# EAGLE board blinker.earring (EAGLE 6.1)
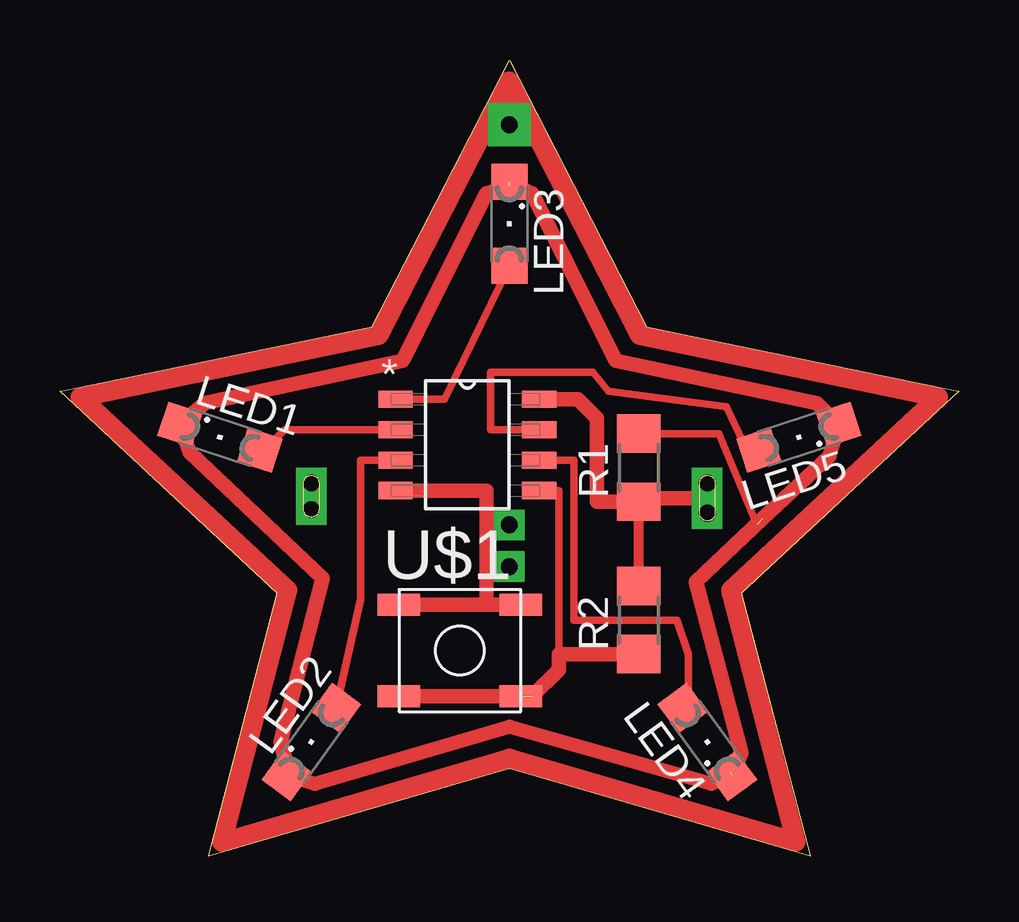
[diagram p0: board, top side]

Size 37.47 x 33.18 mm. Coordinates in mm from the lower left corner, seen from the top.
Outline: 13.02,22.07 18.73,33.18 24.45,22.07 37.47,19.37 28.42,10.95 31.27,0 18.73,3.65 6.19,0 9.05,10.95 0,19.37 13.02,22.07
Outline: 10.16,14.45 10.16,15.56 arc-90 10.48,15.88 arc-90 10.79,15.56 10.79,14.45 arc-90 10.48,14.13 arc-90 10.16,14.45
Outline: 26.67,14.29 26.67,15.56 arc-90 26.99,15.88 arc-90 27.3,15.56 27.3,14.29 arc-90 26.99,13.97 arc-90 26.67,14.29
Copper layers (1*16): Top 0.035mm / dielectric 1.5mm / Bottom 0.035mm
Design rules: minimum track width 10mil, minimum drill 24mil, track to track 8mil, track to pad 8mil, pad to pad 8mil, via to via 8mil, smd to smd 8mil, copper to edge 40mil, drill to drill 8mil, minimum pad ring 10mil, minimum via ring 8mil, stop-mask expansion 4mil, vias tented up to drill 0mil, thermal gap 10mil

## Footprints (pad centres in the part's own frame; a part is rotated, then mirrored left to right if it is on the bottom)
SML1206 = smd 1.5 x 1.5: A 1.75,0; C -1.75,0
R1206 = smd 1.6 x 1.803: 1 -1.422,0; 2 1.422,0
ATTINY13A-SSU = smd 1.422 x 0.711: 1 -5.217,1.905; 2 -5.217,0.635; 3 -5.217,-0.635; 4 -5.217,-1.905; 5 0.772,-1.905; 6 0.772,-0.635; 7 0.772,0.635; 8 0.772,1.905
MINISMD = smd 1.778 x 0.914: P$1 -2.223,3.175; P$2 -2.223,-0.635; P$3 2.857,3.175; P$4 2.857,-0.635

## Placement (x,y rotation side)
LED1  [SML1206]  6.67,17.46 342 top
LED2  [SML1206]  10.48,4.76 54 top
LED3  [SML1206]  18.73,26.35 270 top
LED4  [SML1206]  26.99,4.76 126 top
LED5  [SML1206]  30.8,17.46 198 top
R1  [R1206]  24.13,16.19 90 top
R2  [R1206]  24.13,9.84 90 top
U$1  ATTINY13V-S8S1  [ATTINY13A-SSU]  19.21,17.14 0 top
U$3  MIMISMD  [MINISMD]  16.35,7.3 0 top

## Library data of the parts
LED1-LED5 = led
R1 R2 = rcl
U$1 = Attiny85
U$3 = switch-misc

## Nets
N$1: LED1.A U$1.2
N$2: LED2.A U$1.3
N$3: LED3.A U$1.1
N$4: LED4.A U$1.6
N$5: LED5.A U$1.7
N$6: U$1.4 U$3.P$1 U$3.P$3
N$7: R1.1 R2.2 U$1.8
N$9: LED1.C LED2.C LED3.C LED4.C LED5.C R1.2
N$13: R2.1 U$1.5 U$3.P$2 U$3.P$4

## Tracks (layer width: path | path; a pad name or v marks a point on that pad's centre or on a via)
N$1
  Top 0.305: LED1.A 8.51,16.92 9.37,17.78 U$1.2
N$2  (1 unrouted)
  Top 0.305: LED2.A 12.54,10.71 12.54,16.51 13.97,16.51
N$3
  Top 0.305: LED3.A 16.03,19.05 U$1.1
N$4
  Top 0.305: U$1.6 21.43,16.51 21.43,9.84 25.72,9.84 26.19,8.41 26.19,6.41 LED4.A
N$5
  Top 0.305: 28.48,17.24 27.78,18.73 22.86,19.37 22.23,20.16 17.94,20.16 17.94,17.78 U$1.7
  Top 0.406: LED5.A 28.48,17.24
N$6
  Top 0.61: U$3.P$1 17.78,10.48 | 17.78,10.48 17.78,15.24 U$1.4 | U$3.P$3 17.78,10.48
N$7  (1 unrouted)
  Top 0.406: R2.2 R1.1
  Top 0.61: 20,19.05 21.59,19.05 22.38,18.26 22.38,14.76 R1.1
N$8  (via drill 0.7 pad 1.27)
  Top 0.813: v18.73,13.81 17.94,13.81
N$9  (3 unrouted)
  Top 0.305: R1.2 27.47,17.61 29.05,13.81
  Top 0.406: 6.03,18.88 6.01,18.87
  Top 0.61: LED1.C 6.03,18.88 | 6.01,18.87 14.29,20.64 17.78,27.62 18.73,27.94 | LED3.C 19.68,27.62 23.18,20.64 31.55,18.88 32.42,18.01 LED5.C 32.07,16.67 29.29,14.05 26.51,11.43 28.42,4.29 LED4.C | LED2.C 10.64,3.02 18.73,5.4 27.15,3.02 27.94,3.49
N$10
  Top 0.61: 5.08,17.78 5.4,16.83 10.95,11.59
N$11
  Top 0.61: 10.95,11.59 9.21,4.76 9.53,3.49
N$12  (via drill 0.7 pad 1.27)
  Top 0.813: v18.73,12.06 18.1,12.06
N$13  (1 unrouted)
  Top 0.305: 20.8,8.41 20.8,15.24 U$1.5
  Top 0.406: R2.1 24.3,8.41
  Top 0.61: 24.3,8.41 20.8,8.41 20.8,7.78 19.68,6.67 U$3.P$2
N$15  (via drill 0.7 pad 1.27)
  other vias: 10.48,15.56 10.48,14.45
N$16  (via drill 0.7 pad 1.78)
  other vias: 18.73,30.48
N$17  (via drill 0.7 pad 1.27)
  other vias: 26.99,15.56 26.99,14.29
N$18
  Top 0.61: 28,10.96 27.97,11.09
  Top 0.813: 28,10.96 30.68,0.61 18.73,4.08 6.77,0.59 9.5,11.09 0.85,19.13 13.29,21.71 18.73,32.29 24.17,21.71 36.62,19.13 27.97,11.09
N$19
  Top 0.61: 26.99,14.92 24.13,14.92